# Altium PCB Main.PcbDoc (part 4 of 4)
Units mil, origin at the board's own origin, x right, y up, seen from the top; angles counter-clockwise.
Board outline 16000 x 4900 mil, 4 copper layers (L1-Top, L2-Mid-A, L3-Mid-B, L4-Bottom), stack 285.556 mil thick; 96 components, 105 nets, 278 pads, 8355 vias.
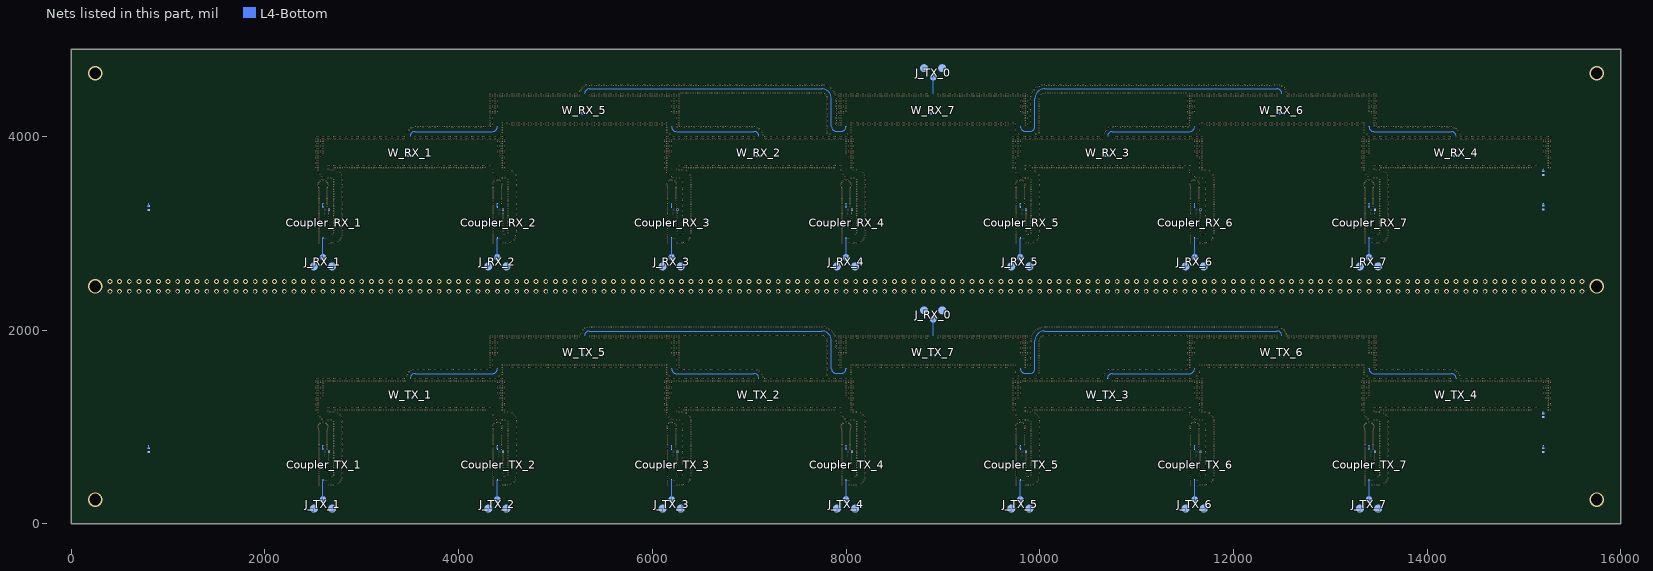
[diagram p6: the nets of this part, all layers, seen from the top]

## Via types
v1: diameter 12, hole 6, L3-Mid-B to L4-Bottom, tented both sides, 5944 vias
v2: diameter 12, hole 6, L3-Mid-B to L4-Bottom, tented bottom, 2081 vias
v3: diameter 50, hole 31, L1-Top to L4-Bottom, tented both sides, 306 vias
v4: diameter 39.37/55.12/55.12 (per signal layer), hole 35.43, L2-Mid-A to L4-Bottom, 18 vias
v5: diameter 150, hole 120, L1-Top to L4-Bottom, 6 vias

## Nets (pads, with @x,y where several pads share a name; then routed paths per layer and width w, separated by ;. In a path a pad name is that pad's centre, name@x,y a point inside that pad or via, vN(x,y) a via of type N, cw(c..) or ccw(c..) an arc to the next point about the centre after c; other vN are vias at no path point) (continued)
GND: (continued)
  other v3: 400,2400 500,2400 600,2400 700,2400 800,2400 900,2400 1000,2400 1100,2400 1200,2400 1300,2400 1400,2400 1500,2400 1600,2400 1700,2400 1800,2400 1900,2400 2000,2400 2100,2400 2200,2400 2300,2400 2400,2400 2500,2400 2600,2400 2700,2400 2800,2400 2900,2400 3000,2400 3100,2400 3200,2400 3300,2400 3400,2400 3500,2400 3600,2400 3700,2400 3800,2400 3900,2400 4000,2400 4100,2400 4200,2400 4300,2400 4400,2400 4500,2400 4600,2400 4700,2400 4800,2400 4900,2400 5000,2400 5100,2400 5200,2400 5300,2400 5400,2400 5500,2400 5600,2400 5700,2400 5800,2400 5900,2400 6000,2400 6100,2400 6200,2400 6300,2400 6400,2400 6500,2400 6600,2400 6700,2400 6800,2400 6900,2400 7000,2400 7100,2400 7200,2400 7300,2400 7400,2400 7500,2400 7600,2400 7700,2400 7800,2400 7900,2400 8000,2400 8100,2400 8200,2400 8300,2400 8400,2400 8500,2400 8600,2400 8700,2400 8800,2400 8900,2400 9000,2400 9100,2400 9200,2400 9300,2400 9400,2400 9500,2400 9600,2400 9700,2400 9800,2400 9900,2400 10000,2400 10100,2400 10200,2400 10300,2400 10400,2400 10500,2400 10600,2400 10700,2400 10800,2400 10900,2400 11000,2400 11100,2400 11200,2400 11300,2400 11400,2400 11500,2400 11600,2400 11700,2400 11800,2400 11900,2400 12000,2400 12100,2400 12200,2400 12300,2400 12400,2400 12500,2400 12600,2400 12700,2400 12800,2400 12900,2400 13000,2400 13100,2400 13200,2400 13300,2400 13400,2400 13500,2400 13600,2400 13700,2400 13800,2400 13900,2400 14000,2400 14100,2400 14200,2400 14300,2400 14400,2400 14500,2400 14600,2400 14700,2400 14800,2400 14900,2400 15000,2400 15100,2400 15200,2400 15300,2400 15400,2400 15500,2400 15600,2400 400,2500 500,2500 600,2500 700,2500 800,2500 900,2500 1000,2500 1100,2500 1200,2500 1300,2500 1400,2500 1500,2500 1600,2500 1700,2500 1800,2500 1900,2500 2000,2500 2100,2500 2200,2500 2300,2500 2400,2500 2500,2500 2600,2500 2700,2500 2800,2500 2900,2500 3000,2500 3100,2500 3200,2500 3300,2500 3400,2500 3500,2500 3600,2500 3700,2500 3800,2500 3900,2500 4000,2500 4100,2500 4200,2500 4300,2500 4400,2500 4500,2500 4600,2500 4700,2500 4800,2500 4900,2500 5000,2500 5100,2500 5200,2500 5300,2500 5400,2500 5500,2500 5600,2500 5700,2500 5800,2500 5900,2500 6000,2500 6100,2500 6200,2500 6300,2500 6400,2500 6500,2500 6600,2500 6700,2500 6800,2500 6900,2500 7000,2500 7100,2500 7200,2500 7300,2500 7400,2500 7500,2500 7600,2500 7700,2500 7800,2500 7900,2500 8000,2500 8100,2500 8200,2500 8300,2500 8400,2500 8500,2500 8600,2500 8700,2500 8800,2500 8900,2500 9000,2500 9100,2500 9200,2500 9300,2500 9400,2500 9500,2500 9600,2500 9700,2500 9800,2500 9900,2500 10000,2500 10100,2500 10200,2500 10300,2500 10400,2500 10500,2500 10600,2500 10700,2500 10800,2500 10900,2500 11000,2500 11100,2500 11200,2500 11300,2500 11400,2500 11500,2500 11600,2500 11700,2500 11800,2500 11900,2500 12000,2500 12100,2500 12200,2500 12300,2500 12400,2500 12500,2500 12600,2500 12700,2500 12800,2500 12900,2500 13000,2500 13100,2500 13200,2500 13300,2500 13400,2500 13500,2500 13600,2500 13700,2500 13800,2500 13900,2500 14000,2500 14100,2500 14200,2500 14300,2500 14400,2500 14500,2500 14600,2500 14700,2500 14800,2500 14900,2500 15000,2500 15100,2500 15200,2500 15300,2500 15400,2500 15500,2500 15600,2500
  other v5: 250,250 15750,250 250,2450 15750,2450 250,4650 15750,4650
NetCoupler_RX_1_In: Coupler_RX_1.In J_RX_1.S | length 56.1
  L4-Bottom w9.4: 2600,2893.9 Coupler_RX_1.In@2600,2950
NetCoupler_RX_1_Out: Coupler_RX_1.Out RX_1.S | length 37.8
  L4-Bottom w9.4: Coupler_RX_1.Out@2600,3270 RX_1.S@2600,3307.85
NetCoupler_RX_2_In: Coupler_RX_2.In J_RX_2.S | length 56.1
  L4-Bottom w9.4: 4400,2893.9 Coupler_RX_2.In@4400,2950
NetCoupler_RX_2_Out: Coupler_RX_2.Out RX_2.S | length 37.8
  L4-Bottom w9.4: Coupler_RX_2.Out@4400,3270 RX_2.S@4400,3307.85
NetCoupler_RX_3_In: Coupler_RX_3.In J_RX_3.S | length 56.1
  L4-Bottom w9.4: 6200,2893.9 Coupler_RX_3.In@6200,2950
NetCoupler_RX_3_Out: Coupler_RX_3.Out RX_3.S | length 37.8
  L4-Bottom w9.4: Coupler_RX_3.Out@6200,3270 RX_3.S@6200,3307.85
NetCoupler_RX_4_In: Coupler_RX_4.In J_RX_4.S | length 56.1
  L4-Bottom w9.4: 8000,2893.9 Coupler_RX_4.In@8000,2950
NetCoupler_RX_4_Out: Coupler_RX_4.Out RX_4.S | length 37.8
  L4-Bottom w9.4: Coupler_RX_4.Out@8000,3270 RX_4.S@8000,3307.85
NetCoupler_RX_5_In: Coupler_RX_5.In J_RX_5.S | length 56.1
  L4-Bottom w9.4: 9800,2893.9 Coupler_RX_5.In@9800,2950
NetCoupler_RX_5_Out: Coupler_RX_5.Out RX_5.S | length 37.8
  L4-Bottom w9.4: Coupler_RX_5.Out@9800,3270 RX_5.S@9800,3307.85
NetCoupler_RX_6_In: Coupler_RX_6.In J_RX_6.S | length 56.1
  L4-Bottom w9.4: 11600,2893.9 Coupler_RX_6.In@11600,2950
NetCoupler_RX_6_Out: Coupler_RX_6.Out RX_6.S | length 37.8
  L4-Bottom w9.4: Coupler_RX_6.Out@11600,3270 RX_6.S@11600,3307.85
NetCoupler_RX_7_In: Coupler_RX_7.In J_RX_7.S | length 56.1
  L4-Bottom w9.4: 13400,2893.9 Coupler_RX_7.In@13400,2950
NetCoupler_RX_7_Out: Coupler_RX_7.Out RX_7.S | length 37.8
  L4-Bottom w9.4: Coupler_RX_7.Out@13400,3270 RX_7.S@13400,3307.85
NetCoupler_TX_1_In: Coupler_TX_1.In J_TX_1.S | length 50.8
  L4-Bottom w9.4: 2600,393.9 Coupler_TX_1.In@2600,444.7
NetCoupler_TX_1_Out: Coupler_TX_1.Out TX_1.S | length 37.9
  L4-Bottom w9.4: Coupler_TX_1.Out@2600,770 TX_1.S@2600,807.85
NetCoupler_TX_2_In: Coupler_TX_2.In J_TX_2.S | length 56.1
  L4-Bottom w9.4: 4400,393.9 Coupler_TX_2.In@4400,450
NetCoupler_TX_2_Out: Coupler_TX_2.Out TX_2.S | length 28.1
  L4-Bottom w9.4: Coupler_TX_2.Out@4400,775 TX_2.S@4400,803.15
NetCoupler_TX_3_In: Coupler_TX_3.In J_TX_3.S | length 56.1
  L4-Bottom w9.4: 6200,393.9 Coupler_TX_3.In@6200,450
NetCoupler_TX_3_Out: Coupler_TX_3.Out TX_3.S | length 28.1
  L4-Bottom w9.4: Coupler_TX_3.Out@6200,775 TX_3.S@6200,803.15
NetCoupler_TX_4_In: Coupler_TX_4.In J_TX_4.S | length 56.1
  L4-Bottom w9.4: 8000,393.9 Coupler_TX_4.In@8000,450
NetCoupler_TX_4_Out: Coupler_TX_4.Out TX_4.S | length 28.1
  L4-Bottom w9.4: Coupler_TX_4.Out@8000,775 TX_4.S@8000,803.15
NetCoupler_TX_5_In: Coupler_TX_5.In J_TX_5.S | length 56.1
  L4-Bottom w9.4: 9800,393.9 Coupler_TX_5.In@9800,450
NetCoupler_TX_5_Out: Coupler_TX_5.Out TX_5.S | length 28.1
  L4-Bottom w9.4: Coupler_TX_5.Out@9800,775 TX_5.S@9800,803.15
NetCoupler_TX_6_In: Coupler_TX_6.In J_TX_6.S | length 56.1
  L4-Bottom w9.4: 11600,393.9 Coupler_TX_6.In@11600,450
NetCoupler_TX_6_Out: Coupler_TX_6.Out TX_6.S | length 28.1
  L4-Bottom w9.4: Coupler_TX_6.Out@11600,775 TX_6.S@11600,803.15
NetCoupler_TX_7_In: Coupler_TX_7.In J_TX_7.S | length 56.1
  L4-Bottom w9.4: 13400,393.9 Coupler_TX_7.In@13400,450
NetCoupler_TX_7_Out: Coupler_TX_7.Out TX_7.S | length 28.1
  L4-Bottom w9.4: Coupler_TX_7.Out@13400,775 TX_7.S@13400,803.15
NetR11_1: R11.1 W_RX_1.Res_Pad2 | length 14.9
  L4-Bottom w9.4: R11.1@3519.68,3800.4 W_RX_1.Res_Pad2@3534.58,3800.4
NetR11_2: R11.2 W_RX_1.Res_Pad1 | length 14.9
  L4-Bottom w9.4: W_RX_1.Res_Pad1@3465.42,3800.4 R11.2@3480.32,3800.4
NetR12_1: R12.1 W_RX_5.Res_Pad2 | length 14.9
  L4-Bottom w9.4: R12.1@5319.69,4240.4 W_RX_5.Res_Pad2@5334.58,4240.4
NetR12_2: R12.2 W_RX_5.Res_Pad1 | length 14.9
  L4-Bottom w9.4: W_RX_5.Res_Pad1@5265.42,4240.4 R12.2@5280.31,4240.4
NetR13_1: R13.1 W_RX_7.Res_Pad2 | length 14.9
  L4-Bottom w9.4: R13.1@8919.68,4240.4 W_RX_7.Res_Pad2@8934.58,4240.4
NetR13_2: R13.2 W_RX_7.Res_Pad1 | length 14.9
  L4-Bottom w9.4: W_RX_7.Res_Pad1@8865.42,4240.4 R13.2@8880.32,4240.4
NetR16_1: R16.1 W_RX_2.Res_Pad2 | length 14.9
  L4-Bottom w9.4: R16.1@7119.69,3800.4 W_RX_2.Res_Pad2@7134.58,3800.4
NetR16_2: R16.2 W_RX_2.Res_Pad1 | length 14.9
  L4-Bottom w9.4: W_RX_2.Res_Pad1@7065.42,3800.4 R16.2@7080.31,3800.4
NetR17_1: R17.1 W_TX_1.Res_Pad2 | length 14.9
  L4-Bottom w9.4: R17.1@3519.68,1300.4 W_TX_1.Res_Pad2@3534.58,1300.4
NetR17_2: R17.2 W_TX_1.Res_Pad1 | length 14.9
  L4-Bottom w9.4: W_TX_1.Res_Pad1@3465.42,1300.4 R17.2@3480.32,1300.4
NetR18_1: R18.1 W_TX_5.Res_Pad2 | length 14.9
  L4-Bottom w9.4: R18.1@5319.69,1740.4 W_TX_5.Res_Pad2@5334.58,1740.4
NetR18_2: R18.2 W_TX_5.Res_Pad1 | length 14.9
  L4-Bottom w9.4: W_TX_5.Res_Pad1@5265.42,1740.4 R18.2@5280.31,1740.4
NetR19_1: R19.1 W_TX_7.Res_Pad2 | length 14.9
  L4-Bottom w9.4: R19.1@8919.68,1740.4 W_TX_7.Res_Pad2@8934.58,1740.4
NetR19_2: R19.2 W_TX_7.Res_Pad1 | length 14.9
  L4-Bottom w9.4: W_TX_7.Res_Pad1@8865.42,1740.4 R19.2@8880.32,1740.4
NetR20_1: R20.1 W_TX_2.Res_Pad2 | length 14.9
  L4-Bottom w9.4: R20.1@7119.69,1300.4 W_TX_2.Res_Pad2@7134.58,1300.4
NetR20_2: R20.2 W_TX_2.Res_Pad1 | length 14.9
  L4-Bottom w9.4: W_TX_2.Res_Pad1@7065.42,1300.4 R20.2@7080.31,1300.4
NetR21_1: R21.1 W_TX_3.Res_Pad2 | length 14.9
  L4-Bottom w9.4: R21.1@10719.68,1300.4 W_TX_3.Res_Pad2@10734.58,1300.4
NetR21_2: R21.2 W_TX_3.Res_Pad1 | length 14.9
  L4-Bottom w9.4: W_TX_3.Res_Pad1@10665.42,1300.4 R21.2@10680.32,1300.4
NetR22_1: R22.1 W_TX_6.Res_Pad2 | length 14.9
  L4-Bottom w9.4: R22.1@12519.68,1740.4 W_TX_6.Res_Pad2@12534.58,1740.4
NetR22_2: R22.2 W_TX_6.Res_Pad1 | length 14.9
  L4-Bottom w9.4: W_TX_6.Res_Pad1@12465.42,1740.4 R22.2@12480.32,1740.4
NetR23_1: R23.1 W_TX_4.Res_Pad2 | length 14.9
  L4-Bottom w9.4: R23.1@14319.68,1300.4 W_TX_4.Res_Pad2@14334.58,1300.4
NetR23_2: R23.2 W_TX_4.Res_Pad1 | length 14.9
  L4-Bottom w9.4: W_TX_4.Res_Pad1@14265.42,1300.4 R23.2@14280.32,1300.4
NetR26_1: R26.1 W_RX_3.Res_Pad2 | length 14.9
  L4-Bottom w9.4: R26.1@10719.68,3800.4 W_RX_3.Res_Pad2@10734.58,3800.4
NetR26_2: R26.2 W_RX_3.Res_Pad1 | length 14.9
  L4-Bottom w9.4: W_RX_3.Res_Pad1@10665.42,3800.4 R26.2@10680.32,3800.4
NetR27_1: R27.1 W_RX_6.Res_Pad2 | length 13.9
  L4-Bottom w9.4: R27.1@12520.68,4240.4 W_RX_6.Res_Pad2@12534.58,4240.4
NetR27_2: R27.2 W_RX_6.Res_Pad1 | length 15.9
  L4-Bottom w9.4: W_RX_6.Res_Pad1@12465.42,4240.4 R27.2@12481.32,4240.4
NetR30_1: R30.1 W_RX_4.Res_Pad2 | length 14.9
  L4-Bottom w9.4: R30.1@14319.68,3800.4 W_RX_4.Res_Pad2@14334.58,3800.4
NetR30_2: R30.2 W_RX_4.Res_Pad1 | length 14.9
  L4-Bottom w9.4: W_RX_4.Res_Pad1@14265.42,3800.4 R30.2@14280.32,3800.4
NetR31_2: R31.2 TX_Dummy_L.S | length 28.2
  L4-Bottom w9.4: R31.2@800,779.68 TX_Dummy_L.S@800,807.85
NetR32_2: R32.2 TX_Dummy_R.S | length 28.2
  L4-Bottom w9.4: R32.2@15200,779.68 TX_Dummy_R.S@15200,807.85
NetR33_2: R33.2 RX_Dummy_L.S | length 28.2
  L4-Bottom w9.4: R33.2@800,3279.68 RX_Dummy_L.S@800,3307.85
NetR34_2: R34.2 RX_Dummy_R.S | length 23.2
  L4-Bottom w9.4: R34.2@15200,3284.68 RX_Dummy_R.S@15200,3307.85
Obs_RX_8: R29.2 W_RX_4.2 | length 22.9
  L4-Bottom w9.4: R29.2@15200,3639.68 W_RX_4.2@15200,3662.6
Obs_RX_12: W_RX_1.C W_RX_5.1 | length 957.1
  L4-Bottom w9.4: W_RX_1.C@3500,4000 cw(c3550,4000) 3550,4050 4350,4050 ccw(c4350,4100) 4400,4100
Obs_RX_34: W_RX_2.C W_RX_5.2 | length 957.1
  L4-Bottom w9.4: 6200,4100 ccw(c6250,4100) 6250,4050 6310,4050 7050,4050 cw(c7050,4000) W_RX_2.C@7100,4000
Obs_RX_56: W_RX_3.C W_RX_6.1 | length 957.1
  L4-Bottom w9.4: W_RX_3.C@10700,4000 cw(c10750,4000) 10750,4050 11541.54,4050 11550,4050 ccw(c11550,4100) 11600,4100
Obs_RX_78: W_RX_4.C W_RX_6.2 | length 957.1
  L4-Bottom w9.4: 13400,4100 ccw(c13450,4100) 13450,4050 13460,4050 14250,4050 cw(c14250,4000) W_RX_4.C@14300,4000
Obs_RX_1234: W_RX_5.C W_RX_7.1 | length 3130.1
  L4-Bottom w9.4: W_RX_5.C@5300,4440 cw(c5350,4440) 5350,4490 7750,4490 cw(c7750,4390) 7850,4390 7850,4102.6 ccw(c7900,4102.6) 7900,4052.6 7950,4052.6 ccw(c7950,4102.6) W_RX_7.1@8000,4102.6
Obs_RX_5678: W_RX_6.C W_RX_7.2 | length 3130.1
  L4-Bottom w9.4: W_RX_7.2@9800,4102.6 ccw(c9850,4102.6) 9850,4052.6 9900,4052.6 ccw(c9900,4102.6) 9950,4102.6 9950,4390 cw(c10050,4390) 10050,4490 12450,4490 cw(c12450,4440) W_RX_6.C@12500,4440
Obs_RX_All: J_TX_0.S W_RX_7.C | length 26.1
  L4-Bottom w9.4: W_RX_7.C@8900,4440 8900,4466.1
Obs_TX_8: R8.2 W_TX_4.2 | length 22.9
  L4-Bottom w9.4: R8.2@15200,1139.68 W_TX_4.2@15200,1162.6
Obs_TX_12: W_TX_1.C W_TX_5.1 | length 957.1
  L4-Bottom w9.4: W_TX_1.C@3500,1500 cw(c3550,1500) 3550,1550 4350,1550 ccw(c4350,1600) 4400,1600
Obs_TX_34: W_TX_2.C W_TX_5.2 | length 957.1
  L4-Bottom w9.4: 6200,1600 ccw(c6250,1600) 6250,1550 6310,1550 7050,1550 cw(c7050,1500) W_TX_2.C@7100,1500
Obs_TX_56: W_TX_3.C W_TX_6.1 | length 957.1
  L4-Bottom w9.4: W_TX_3.C@10700,1500 cw(c10750,1500) 10750,1550 11541.54,1550 11550,1550 ccw(c11550,1600) 11600,1600
Obs_TX_78: W_TX_4.C W_TX_6.2 | length 957.1
  L4-Bottom w9.4: 13400,1600 ccw(c13450,1600) 13450,1550 13460,1550 14250,1550 cw(c14250,1500) W_TX_4.C@14300,1500
Obs_TX_1234: W_TX_5.C W_TX_7.1 | length 3130.1
  L4-Bottom w9.4: W_TX_5.C@5300,1940 cw(c5350,1940) 5350,1990 7750,1990 cw(c7750,1890) 7850,1890 7850,1602.6 ccw(c7900,1602.6) 7900,1552.6 7950,1552.6 ccw(c7950,1602.6) W_TX_7.1@8000,1602.6
Obs_TX_5678: W_TX_6.C W_TX_7.2 | length 3130.1
  L4-Bottom w9.4: W_TX_7.2@9800,1602.6 ccw(c9850,1602.6) 9850,1552.6 9900,1552.6 ccw(c9900,1602.6) 9950,1602.6 9950,1890 cw(c10050,1890) 10050,1990 12450,1990 cw(c12450,1940) W_TX_6.C@12500,1940
Obs_TX_All: J_RX_0.S W_TX_7.C | length 26.1
  L4-Bottom w9.4: W_TX_7.C@8900,1940 8900,1966.1
copper on no net:
  other v4: 800,1000 2600,1000 4400,1000 6200,1000 8000,1000 9800,1000 11600,1000 13400,1000 15200,1000 800,3500 2600,3500 4400,3500 6200,3500 8000,3500 9800,3500 11600,3500 13400,3500 15200,3500

## Polygon pours and split planes (outlines as drawn)
GND on L3-Mid-B "L3-GND" (solid, pour order 4): 0,0 16000,0 16000,4900 0,4900
GND on L4-Bottom "L4-GND" (solid, pour order 5): 0,0 16000,0 16000,4900 0,4900

## Silkscreen, mask and mechanical layers (free items; w line width, h text height)
Top Overlay:
  lines w12: 1000,2400 15000,2400 ; 1000,2500 15000,2500
  text "PI-RADIO ANTENNA ARRAY WITH SELF OBSERVATION / CALIBRATION (3.0 - 3.5 GHz)" at 500,4475 h350
  text "1" at 2403.51,3050 h300
  text "2" at 4203.51,3050 h300
  text "3" at 6003.51,3050 h300
  text "4" at 7803.51,3050 h300
  text "5" at 9603.51,3050 h300
  text "6" at 11403.51,3050 h300
  text "7" at 13203.51,3050 h300
  text "RECEIVE ARRAY" at 7206.95,2670.18 h300
  text "1" at 2403.51,550 h300
  text "2" at 4203.51,550 h300
  text "3" at 6003.51,550 h300
  text "4" at 7803.51,550 h300
  text "5" at 9603.51,550 h300
  text "6" at 11403.51,550 h300
  text "7" at 13203.51,550 h300
  text "TRANSMIT ARRAY" at 7143.47,170.18 h300
  text "REV 2.0" at 14541.25,155 h350
Bottom Overlay:
  lines w12: 1000,2400 15000,2400 ; 1000,2500 15000,2500
  text "RECEIVE OBSERVATION (INPUT)" at 8742.47,4580 h300
  text "RECEIVE PORTS (OUTPUT)" at 1967.97,2650 h300
  text "1" at 2466.38,2650 h300
  text "2" at 4266.38,2650 h300
  text "3" at 6066.38,2650 h300
  text "4" at 7866.38,2650 h300
  text "5" at 9666.38,2650 h300
  text "6" at 11466.38,2650 h300
  text "7" at 13266.38,2650 h300
  text "TRANSMIT OBSERVATION (OUTPUT)" at 8742.47,2080 h300
  text "SEMPER UBI SUB UBI" at 14796.49,1045 h150
  text "TRANSMIT PORTS (INPUT)" at 1967.97,150 h300
  text "1" at 2466.38,150 h300
  text "2" at 4266.38,150 h300
  text "3" at 6066.38,150 h300
  text "4" at 7866.38,150 h300
  text "5" at 9666.38,150 h300
  text "6" at 11466.38,150 h300
  text "7" at 13266.38,150 h300